# Altium PCB tc_tp5_ej1.PcbDoc
Units mm, origin at the board's own origin, x right, y up, seen from the top; angles counter-clockwise.
Board outline 100.08 x 100.04 mm, 2 copper layers (Top Layer, Bottom Layer); 46 components, 35 nets, 121 pads, 0 vias.
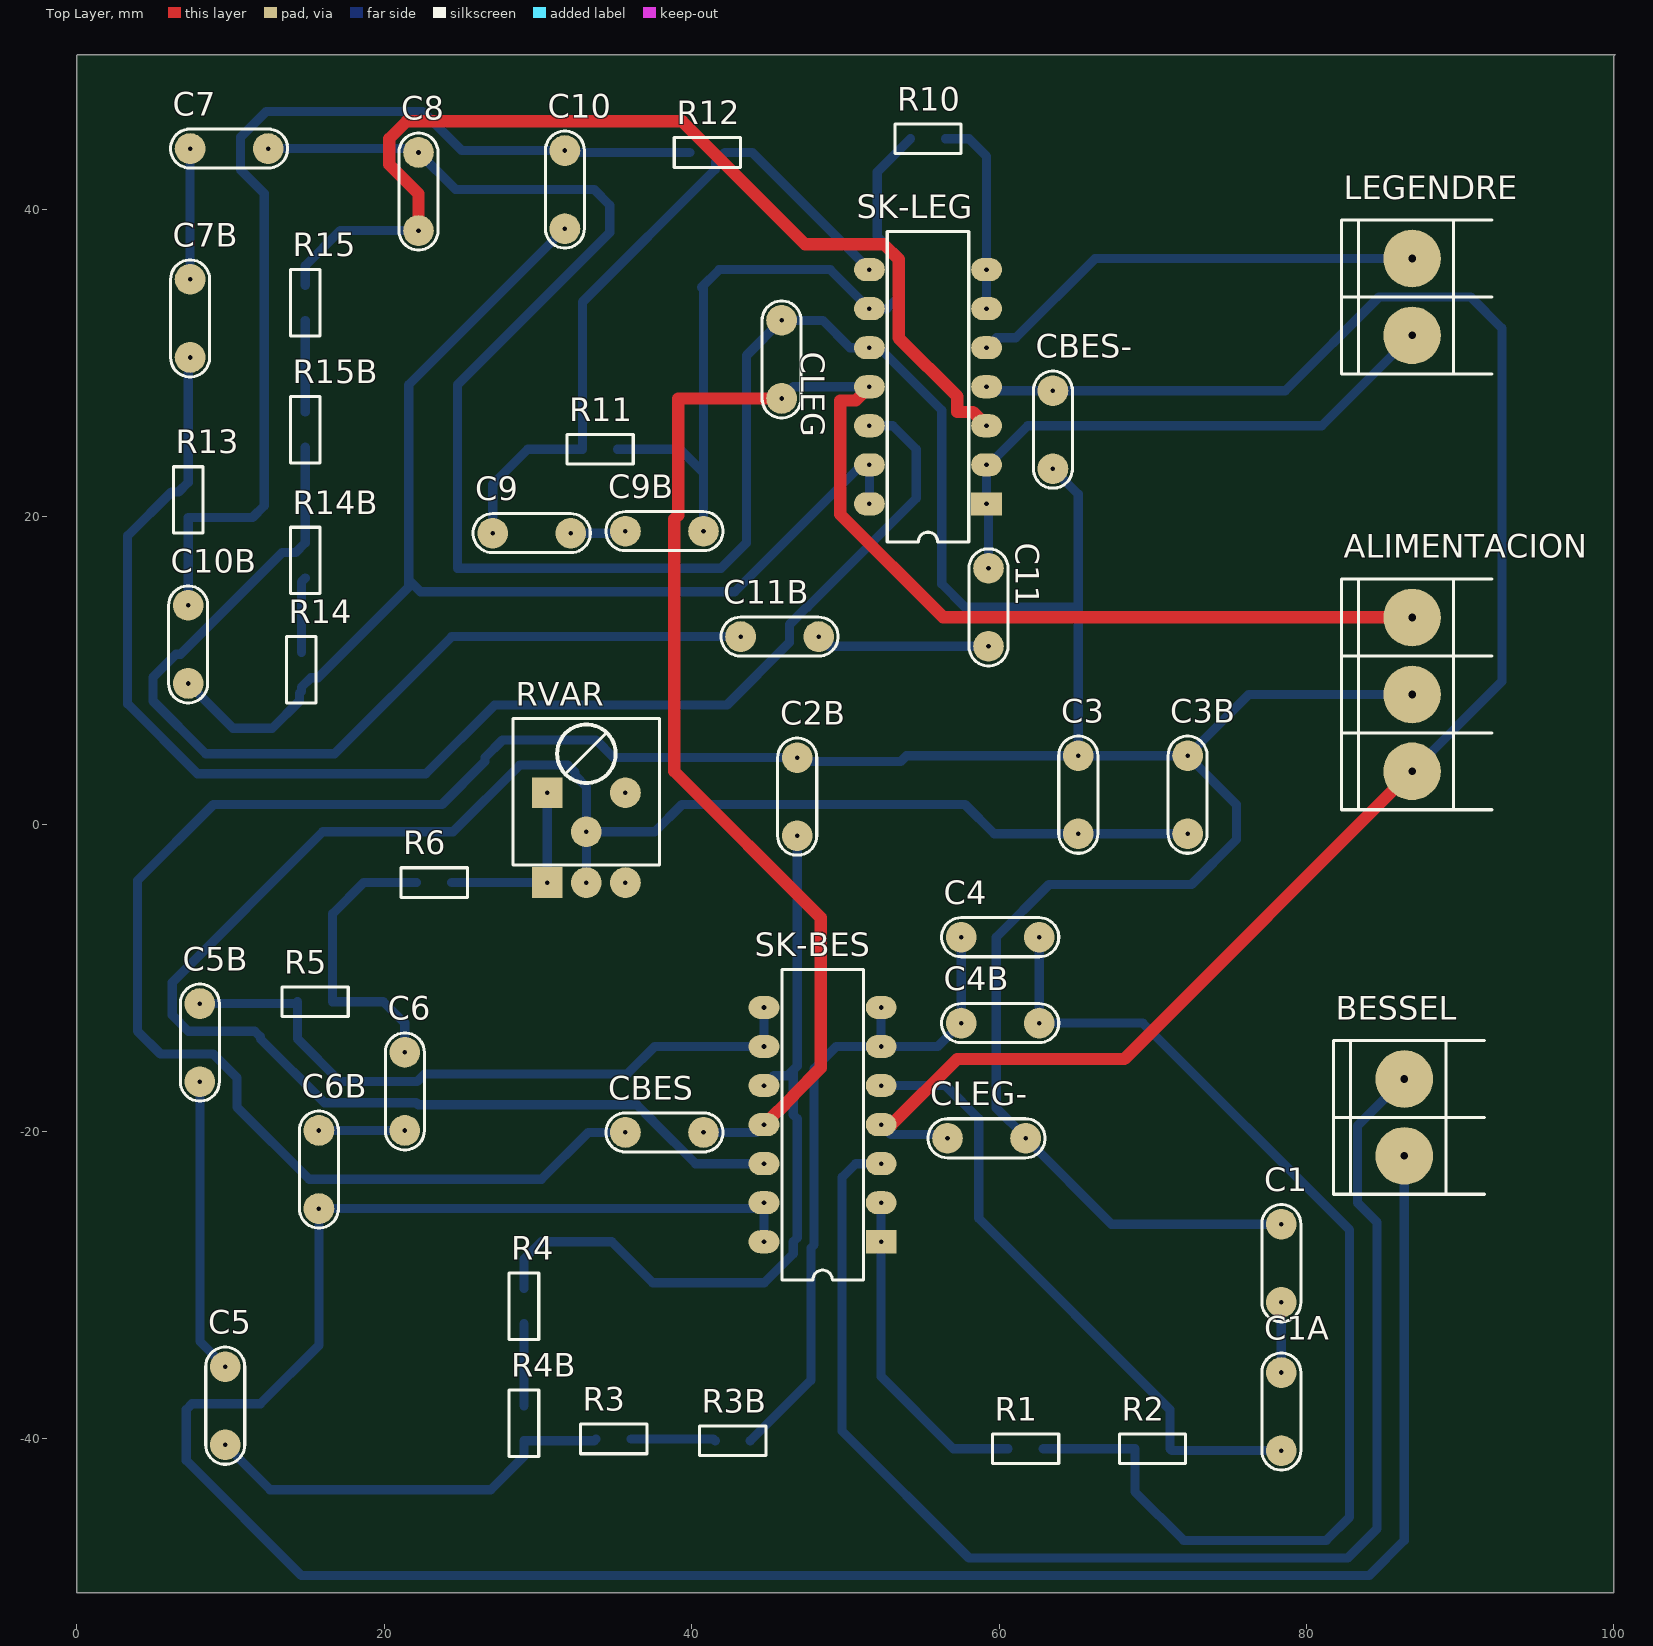
[diagram p0: Top Layer view]
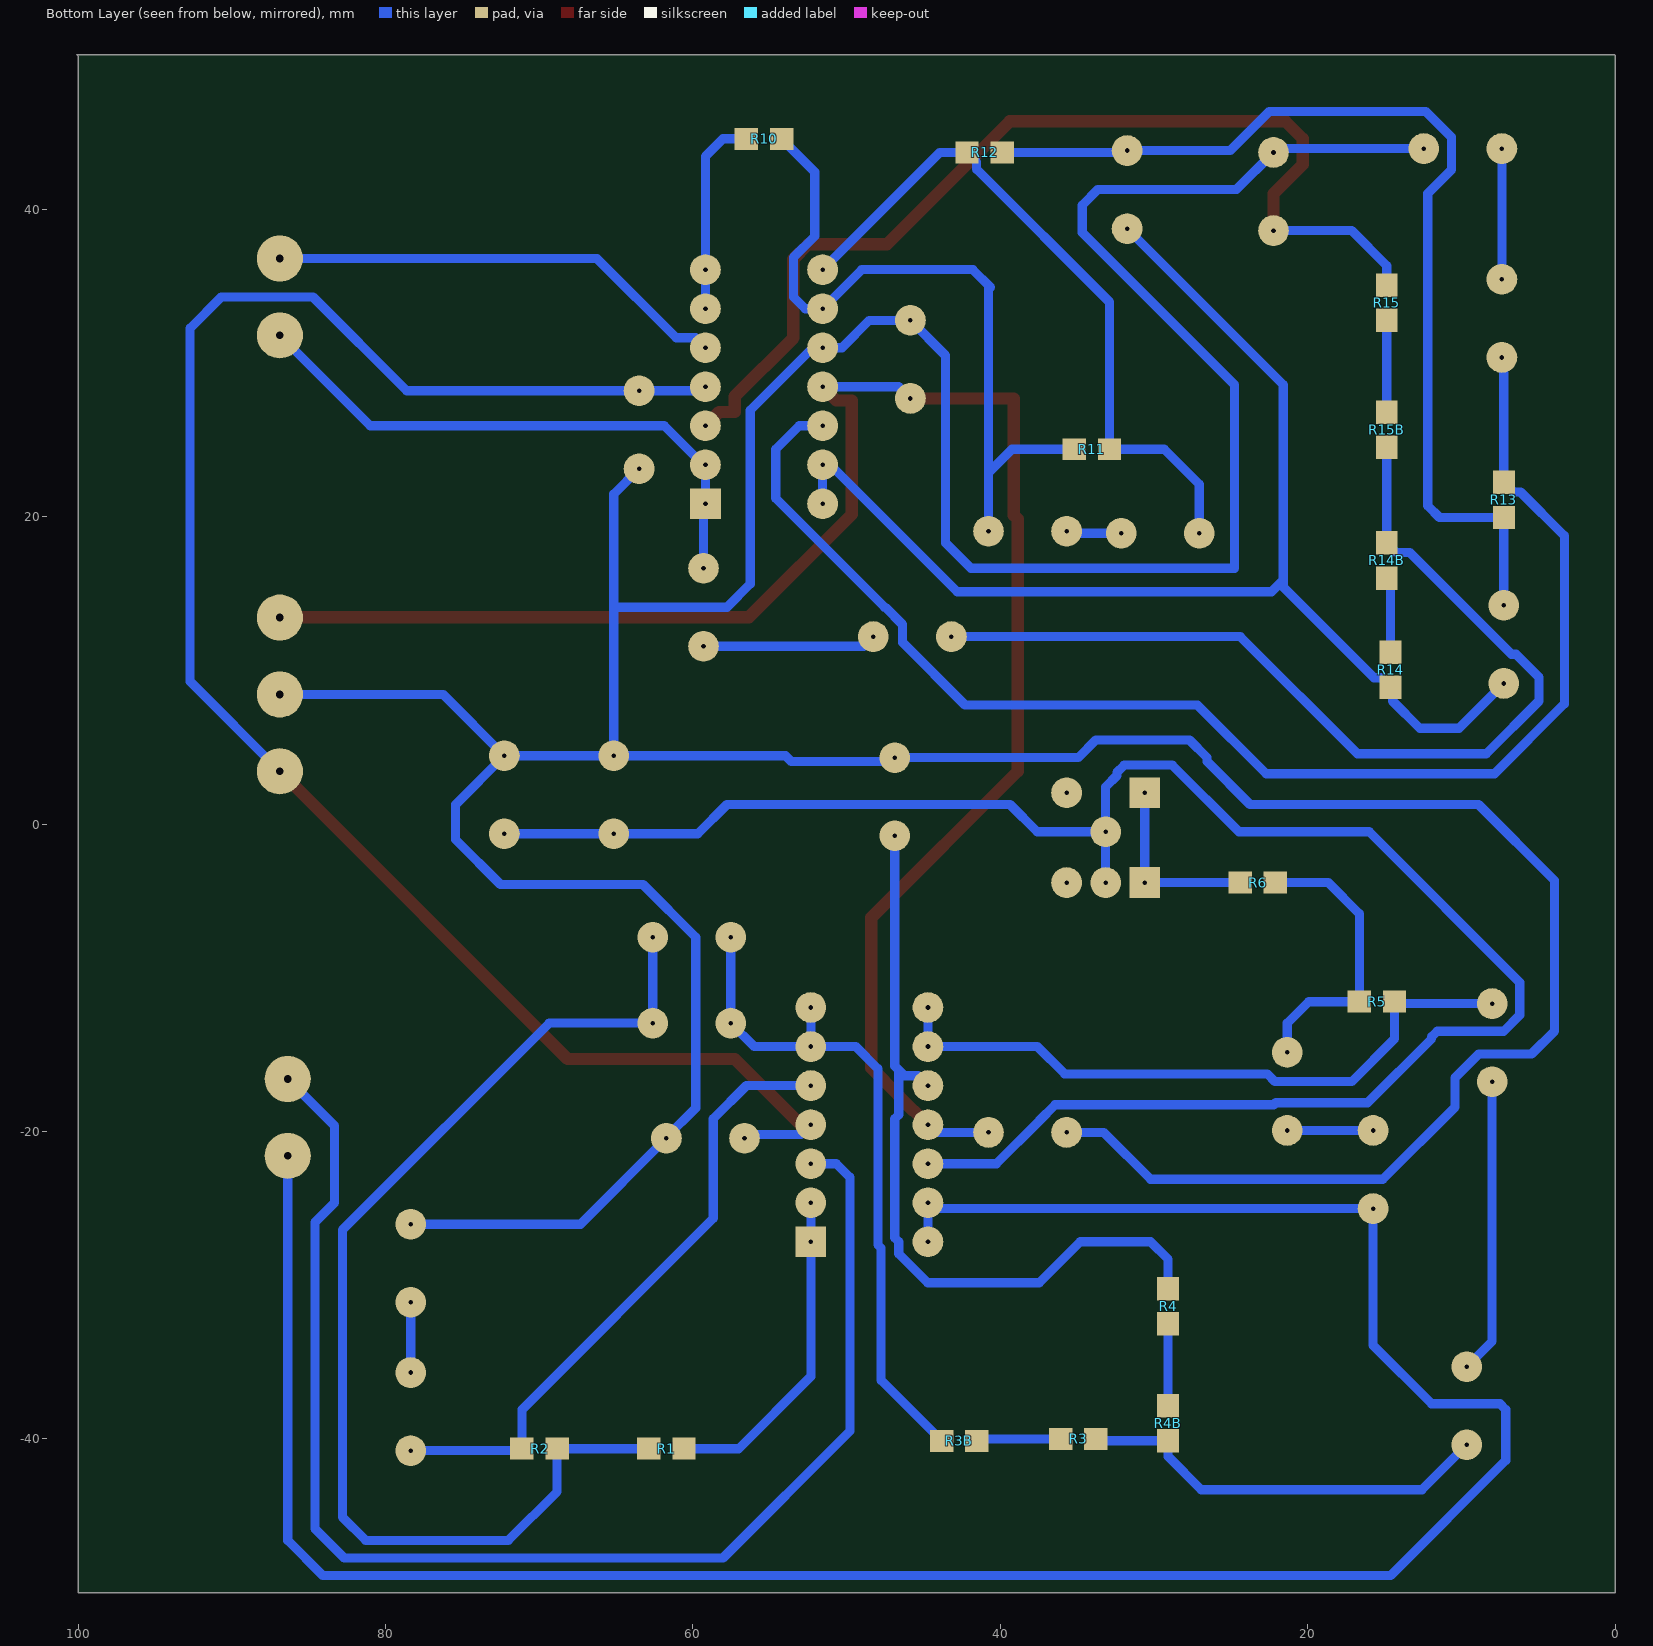
[diagram p1: Bottom Layer view, seen from below]
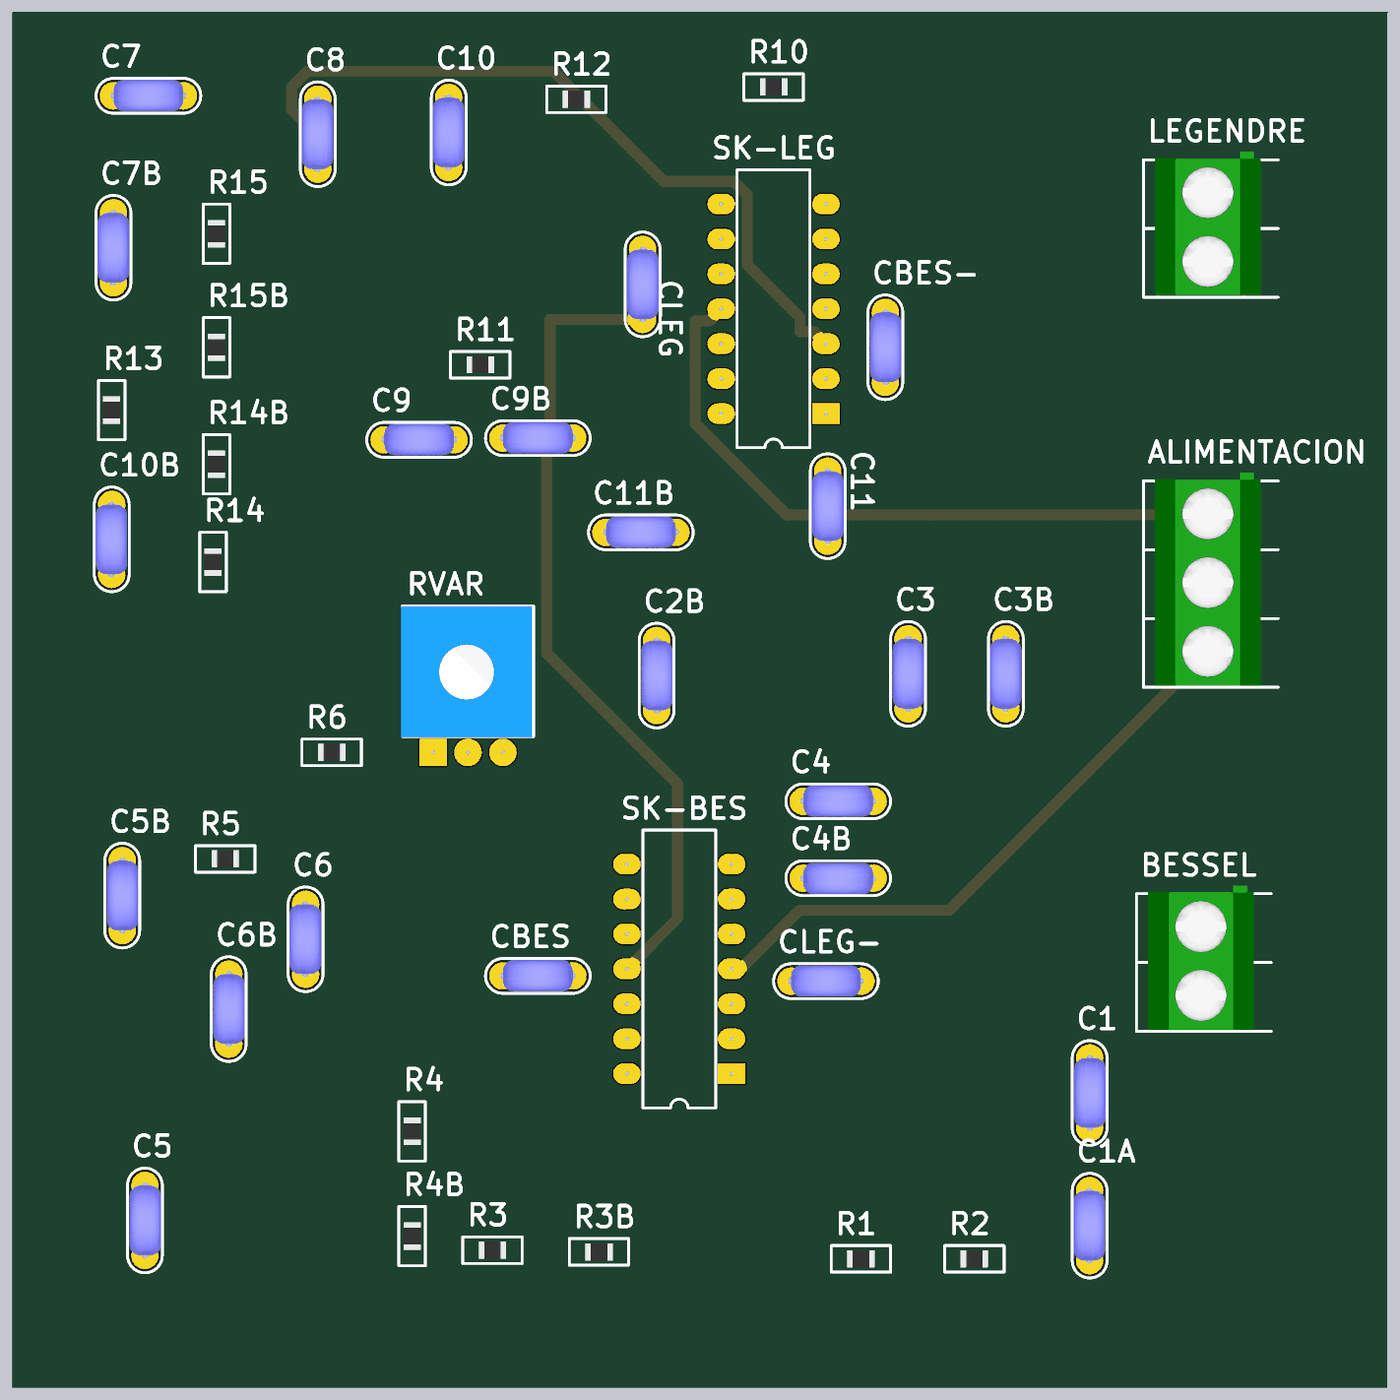
[diagram p2: 3D render of the assembled board from above, using the file's embedded part models]

## Layer stack, top to bottom
Top Solder: solder mask 0.0102, Solder Resist, Dk 3.5
Top Layer: signal copper 0.0356
Dielectric 1: dielectric 0.32, FR-4, Dk 4.8
Bottom Layer: signal copper 0.0356
Bottom Solder: solder mask 0.0102, Solder Resist, Dk 3.5

## Board outline
0,50 0.038,50.038 100.076,50.038 100,49.962 100,-50 0,-50

## Design rules (kind name [scope] priority, off if disabled: settings)
Clearance [All] p1: gap=0.5 ignorepadtopadclearanceinfootprint=FALSE
PolygonConnect [All] p1: connectstyle=Relief reliefconductorwidth=0.254 reliefentries=4 polygonreliefangle="90 Angle" airgapwidth=0.254
RoutingVias [All] p1: holewidth=0.5 width=2 viastyle="Through Hole" minholewidth=0.5 minwidth=2 maxholewidth=0.5 maxwidth=2
SolderMaskExpansion [All] p1: expansion=0.102
Width [All] p1: maxlimit=0.8 minlimit=0.6 preferedwidth=0.6
30 further rules are at their usual default settings.

## Classes and differential pairs
component class tc_tp5_ej1: ALIMENTACION BESSEL C1 C2B C3B C4 C4B C5 C5B C6 C6B C7 C7B C8 C9 C9B C10 C10B C11 C11B CBES CBES- CLEG CLEG- LEGENDRE R1 R2 R3 R3B R4 R4B R5 R6 R10 R12 R13 R14 R14B R15 R15B RVAR SK-LEG

## Components (designator, comment, footprint, x,y, rotation, side; value= is the part's Value field where it differs from the comment)
ALIMENTACION "BORNERA 3" BORNERA3 86.868,8.429 r0 top
BESSEL "BORNERA 2" BORNERA2 86.36,-19.09 r0 top
C1 "CAP" CAP200 78.359,-28.575 r90 top
C1A "CAP" CAP200 78.359,-38.227 r270 top
C2B "CAP" CAP200 46.863,1.778 r90 top
C3 "CAP" CAP200 65.151,1.905 r90 top
C3B "CAP" CAP200 72.263,1.905 r270 top
C4 "CAP" CAP200 60.071,-7.366 r180 top
C4B "CAP" CAP200 60.071,-12.954 r0 top
C5 "CAP" CAP200 9.652,-37.846 r90 top
C5B "CAP" CAP200 8.001,-14.224 r90 top
C6 "CAP" CAP200 21.336,-17.399 r270 top
C6B "CAP" CAP200 15.748,-22.479 r90 top
C7 "CAP" CAP200 9.906,43.942 r180 top
C7B "CAP" CAP200 7.366,32.893 r270 top
C8 "CAP" CAP200 22.225,41.148 r270 top
C9 "CAP" CAP200 29.591,18.923 r180 top
C9B "CAP" CAP200 38.227,19.05 r180 top
C10 "CAP" CAP200 31.75,41.275 r270 top
C10B "CAP" CAP200 7.239,11.684 r270 top
C11 "CAP" CAP200 59.309,14.097 r90 top
C11B "CAP" CAP200 45.72,12.192 r180 top
CBES "CAP" CAP200 38.227,-20.066 r180 top
CBES- "CAP" CAP200 63.5,25.654 r90 top
CLEG "CAP" CAP200 45.847,30.226 r90 top
CLEG- "CAP" CAP200 59.182,-20.447 r180 top
LEGENDRE "BORNERA 2" BORNERA2 86.868,34.29 r0 top
R1 "RES" 0805 61.722,-40.64 r0 top
R2 "RES" 0805 69.977,-40.64 r0 top
R3 "RES" 0805 34.925,-40.005 r180 top
R3B "RES" 0805 42.672,-40.132 r180 top
R4 "RES" 0805 29.083,-31.369 r90 top
R4B "RES" 0805 29.083,-38.989 r90 top
R5 "RES" 0805 15.494,-11.557 r0 top
R6 "RES" 0805 23.241,-3.81 r0 top
R10 "RES" 0805 55.372,44.577 r180 top
R11 "RES" 0805 34.036,24.384 r180 top
R12 "RES" 0805 41.021,43.688 r180 top
R13 "RES" 0805 7.239,21.082 r90 top
R14 "RES" 0805 14.605,10.033 r270 top
R14B "RES" 0805 14.859,17.145 r270 top
R15 "RES" 0805 14.859,33.909 r90 top
R15B "RES" 0805 14.859,25.654 r90 top
RVAR "PRESET" "PRESET H" 33.107,2.032 r0 top
SK-BES "TL074ACN" DIP14 48.514,-19.558 r90 top
SK-LEG "TL074ACN" DIP14 55.372,28.448 r90 top

## Footprints (in the part's own frame and the unit in brackets; to place one, negate y for a bottom-side part, rotate by r counter-clockwise, add the part's x,y. Pads: shape width x height; smd on the part's side, far side on the other; paste and mask are expansions set on the pad)
0805 [mil] "Pasivo 0805"
  rect 60x56 smd far side: 1(-45,0) 2(45,0)
  silkscreen extent -85,-38 85,38, body extent -40,-24 39,25, height 15
BORNERA2 [mm] "Bornera con Tornillos 5mm separación"
  round 3.75 / inner round 3.75 / far side round 3 hole 0.5: 1(0,2.5) 2(0,-2.5)
  silkscreen extent -4.6,-5 5.2,5, body extent -3.76,-4.89 3.94,5.61, height 10
BORNERA3 [mm] "Bornera con Tornillos 5mm separación"
  round 3.75 / inner round 3.75 / far side round 3 hole 0.5: 1(0,5) 2(0,0) 3(0,-5)
  silkscreen extent -4.6,-7.5 5.2,7.5, body extent -3.76,-7.39 3.94,8.11, height 10.05
CAP200 [mm]
  round 2 hole 0.3: 1(-2.54,0) 2(2.54,0)
  silkscreen extent -3.81,-1.27 3.81,1.27, body extent -2.79,-1.17 2.79,1.12, height 6.24
DIP14 [mm] "DIP; 14 Leads; Row Spacing 7.62 mm; Pitch 2.54 mm"
  rect 1.5x2 / inner rect 1.5x2 / far side rect 2x2 hole 0.3: 1(-7.62,-3.81)
  oval 1.5x2 / inner oval 1.5x2 / far side round 2 hole 0.3: 2(-5.08,-3.81) 3(-2.54,-3.81) 4(0,-3.81) 5(2.54,-3.81) 6(5.08,-3.81) 7(7.62,-3.81) 8(7.62,3.81) 9(5.08,3.81) 10(2.54,3.81) 11(0,3.81) 12(-2.54,3.81) 13(-5.08,3.81) 14(-7.62,3.81)
  silkscreen extent -10.1,-2.65 10.1,2.65
"PRESET H" [mm]
  rect 2x2 hole 0.3: 1(-2.5,-5.842) 1(-2.5,0)
  round 2 hole 0.3: 2(0.04,-5.842) 2(0.04,-2.54) 3(2.58,-5.842) 3(2.58,0)
  silkscreen extent -4.72,-4.7 4.8,4.83, body extent -4.83,-4.76 4.7,4.77, height 5

## Part data
SK-BES SK-LEG: "Low-Noise J-FET Quad Operational Amplifier", ComponentLink1Description="Manufacturer Link", ComponentLink1URL=http://www.st.com/, ComponentLink2Description=Datasheet, ComponentLink2URL=http://www.st.com/stonline/products/literature/ds/2297/tl074.pdf, DatasheetVersion=Dec-1998, LatestRevisionDate=06-Jun-2005, LatestRevisionNote="Stylized 3D Model Added.", PackageDescription="DIP; 14 Leads; Row Spacing 7.62 mm; Pitch 2.54 mm", PackageReference=DIP14, PackageVersion=Jan-1997, Published=24-Aug-2001, Publisher="Altium Limited"

## Nets (pads, with @x,y where several pads share a name; then routed paths per layer and width w, separated by ;. In a path a pad name is that pad's centre, name@x,y a point inside that pad or via, vN(x,y) a via of type N, cw(c..) or ccw(c..) an arc to the next point about the centre after c; other vN are vias at no path point)
BES_IN: BESSEL.1 SK-BES.3 | length 89.5
  Bottom Layer w0.6: SK-BES.3 50.673,-22.098 49.784,-22.987 49.784,-39.497 58.039,-47.752 82.677,-47.752 84.582,-45.847 84.582,-25.908 83.312,-24.638 83.312,-19.638 BESSEL.1
BES_OUT: BESSEL.2 C6B.1 SK-BES.13 SK-BES.14 | length 162.5
  Bottom Layer w0.6: SK-BES.14 SK-BES.13 44.323,-25.019 C6B.1 15.748,-33.909 11.938,-37.719 7.493,-37.719 7.112,-38.1 7.112,-41.402 14.605,-48.895 84.074,-48.895 86.36,-46.609 BESSEL.2
GND: ALIMENTACION.2 C1.2 C2B.2 C3.2 C3B.1 C7.1 C8.1 CBES-.1 CBES.2 CLEG-.1 CLEG.2 SK-LEG.10 | length 334.4
  Bottom Layer w0.6: C7.1 21.971,43.942 C8.1 24.638,41.275 33.655,41.275 34.671,40.259 34.671,38.481 24.765,28.575 24.765,16.637 41.91,16.637 43.561,18.288 43.561,30.48 CLEG.2 48.524,32.766 50.302,30.988 SK-LEG.10 52.197,30.988 56.261,26.924 56.261,15.621 57.785,14.097 65.151,14.097 ; CBES.2 33.274,-20.066 30.221,-23.119 15.113,-23.119 10.414,-18.42 10.414,-16.51 8.868,-14.964 5.439,-14.964 3.937,-13.462 3.937,-3.683 8.89,1.27 23.749,1.27 26.543,4.064 26.543,4.318 27.686,5.461 33.782,5.461 34.925,4.318 C2B.2 47.117,4.064 53.594,4.064 53.975,4.445 C3.2 ; CBES-.1 65.151,21.463 65.151,14.097 ; C1.2 67.31,-26.035 CLEG-.1 61.722,-20.387 59.817,-18.482 59.817,-7.366 63.246,-3.937 72.517,-3.937 75.438,-1.016 75.438,1.27 C3B.1 ; ALIMENTACION.2 76.247,8.429 C3B.1 ; C3.2 65.151,14.097 ; C3.2 C3B.1
LEG_IN: LEGENDRE.1 SK-LEG.5 | length 30.1
  Bottom Layer w0.6: SK-LEG.5 59.822,31.628 61.082,31.628 66.244,36.79 LEGENDRE.1
LEG_OUT: C11.2 LEGENDRE.2 SK-LEG.1 SK-LEG.2 | length 38
  Bottom Layer w0.6: C11.2 59.309,20.701 SK-LEG.1 SK-LEG.2 59.329,23.368 61.869,25.908 80.986,25.908 LEGENDRE.2
NetC1_1: C1.1 C1A.1 | length 4.6
  Bottom Layer w0.6: C1A.1 C1.1
NetC1A_2: C1A.2 R2.2 SK-BES.5 | length 41.2
  Bottom Layer w0.6: SK-BES.5 56.515,-17.018 58.674,-19.177 58.674,-25.654 71.12,-38.1 R2.2 71.247,-40.767 C1A.2
NetC2_1: C2B.1 R4.2 SK-BES.10 | length 52
  Bottom Layer w0.6: R4.2 29.083,-28.321 30.226,-27.178 34.798,-27.178 37.465,-29.845 44.724,-29.845 46.604,-27.965 46.604,-27.183 46.863,-26.924 46.863,-19.177 46.604,-18.918 46.604,-16.007 ; SK-BES.10 45.344,-16.378 46.233,-16.378 46.604,-16.007 ; C2B.1@47.117,-1.016 C2B.1 46.863,-15.748 46.604,-16.007
NetC3_1: C3.1 C3B.2 RVAR.2 SK-BES.12 | length 125.2
  Top Layer w0.8: RVAR.2@33.147,-3.957 RVAR.2@33.147,-3.81
  Bottom Layer w0.6: RVAR.2@33.147,-3.81 RVAR.2@33.147,-0.508 ; SK-BES.12 40.253,-22.098 37.487,-19.332 37.487,-19.32 36.433,-18.266 22.209,-18.266 22.082,-18.139 16.107,-18.139 11.938,-13.97 11.938,-13.843 11.579,-13.484 7.255,-13.484 6.201,-12.43 6.201,-10.309 16.002,-0.508 24.467,-0.508 28.807,3.832 31.938,3.832 32.407,3.363 32.407,3.153 33.147,2.413 RVAR.2@33.147,-0.508 ; C3B.2 C3.1 59.69,-0.635 57.785,1.27 39.37,1.27 37.592,-0.508 RVAR.2@33.147,-0.508
NetC4_1: C4.1 C4B.2 R1.2 R2.1 | length 74.7
  Bottom Layer w0.6: C4.1 C4B.2 69.342,-12.954 82.804,-26.416 82.804,-45.085 81.28,-46.609 72.009,-46.609 68.834,-43.434 R2.1 R1.2
NetC4_2: C4.2 C4B.1 R3B.1 SK-BES.6 SK-BES.7 | length 44.9
  Bottom Layer w0.6: R3B.1 47.752,-36.195 47.752,-27.591 47.963,-27.38 47.963,-15.918 49.403,-14.478 SK-BES.6 ; SK-BES.7 SK-BES.6 ; C4.2 C4B.1 56.007,-14.478 SK-BES.6
NetC5_1: C5.1 R3.2 R4B.1 | length 27.3
  Bottom Layer w0.6: C5.1 12.573,-43.307 26.924,-43.307 29.083,-41.148 R4B.1 33.655,-40.132 R3.2
NetC5_2: C5.2 C5B.1 | length 19.2
  Bottom Layer w0.6: C5B.1 8.001,-33.655 C5.2
NetC5B_2: C5B.2 R5.1 SK-BES.8 SK-BES.9 | length 43.8
  Bottom Layer w0.6: C5B.2 14.224,-11.684 R5.1 14.351,-13.97 17.14,-16.759 22.123,-16.759 22.626,-16.256 35.814,-16.256 37.592,-14.478 SK-BES.9 SK-BES.8
NetC6_1: C6.1 R5.2 R6.1 | length 19.2
  Bottom Layer w0.6: C6.1 21.336,-12.954 19.939,-11.557 R5.2 16.637,-5.842 18.669,-3.81 R6.1
NetC6_2: C6.2 C6B.2 | length 5.6
  Bottom Layer w0.6: C6B.2 C6.2
NetC7_2: C7.2 C7B.1 | length 8.5
  Bottom Layer w0.6: C7B.1 C7.2
NetC7B_2: C7B.2 R13.2 SK-LEG.12 | length 91.6
  Bottom Layer w0.6: 7.239,29.337 R13.2 6.615,21.601 6.155,21.601 3.302,18.748 3.302,7.814 7.844,3.272 22.703,3.272 27.178,7.747 42.291,7.747 46.36,11.816 46.36,12.979 47.473,14.092 47.513,14.092 54.61,21.189 54.61,24.384 53.086,25.908 SK-LEG.12
NetC8_2: C8.2 R15.2 SK-LEG.3 | length 67.5
  Top Layer w0.8: C8.2 22.225,41.001 20.325,42.901 20.325,44.582 21.458,45.715 39.375,45.715 47.372,37.718 52.495,37.718 53.462,36.751 53.462,31.628 57.282,27.808 57.282,26.798 58.292,26.798 SK-LEG.3
  Bottom Layer w0.6: R15.2 14.859,36.322 17.145,38.608 C8.2
NetC9_1: C9.1 C9B.2 | length 3.6
  Bottom Layer w0.6: C9.1 35.56,18.923 C9B.2
NetC9_2: C9.2 R11.2 R12.1 SK-LEG.8 | length 45.7
  Bottom Layer w0.6: C9.2 27.051,22.098 29.337,24.384 R11.2 32.893,33.957 41.54,42.604 41.54,43.064 R12.1 43.942,43.688 SK-LEG.8
NetC9B_1: C9B.1 R10.2 R11.1 SK-LEG.9 | length 48.6
  Top Layer w0.8: SK-LEG.9@51.519,33.528 SK-LEG.9
  Bottom Layer w0.6: R11.1 39.243,24.384 40.767,22.86 ; C9B.1 40.767,22.86 ; R10.2 52.07,42.418 52.07,38.247 53.462,36.855 53.462,34.295 52.695,33.528 SK-LEG.9 51.556,33.528 49.016,36.068 41.783,36.068 40.64,34.925 40.767,34.798 40.767,22.86
NetC10_1: C10.1 C10B.1 R12.2 R13.1 | length 66.6
  Bottom Layer w0.6: C10B.1 R13.1 11.43,19.939 12.192,20.701 12.192,41.021 10.646,42.567 10.646,44.688 12.313,46.355 22.499,46.355 25.039,43.815 C10.1 31.877,43.688 R12.2
NetC10_2: C10.2 C10B.2 R14.2 SK-LEG.13 SK-LEG.14 | length 83.6
  Bottom Layer w0.6: C10B.2 10.16,6.223 12.7,6.223 14.478,8.001 14.478,8.509 14.605,8.636 R14.2 15.229,9.514 15.689,9.514 21.59,15.415 21.59,15.875 ; C10.2 21.59,28.575 21.59,15.875 ; SK-LEG.14 SK-LEG.13 51.054,23.368 42.799,15.113 22.352,15.113 21.59,15.875
NetC11_1: C11.1 C11B.1 | length 11.3
  Bottom Layer w0.6: C11B.1 48.895,11.557 C11.1
NetC11B_2: C11B.2 R14B.1 R15B.1 | length 64.1
  Bottom Layer w0.6: R15B.1 R14B.1 14.235,17.664 13.366,17.664 6.746,11.044 6.452,11.044 4.953,9.545 4.953,8.001 8.382,4.572 16.764,4.572 24.384,12.192 C11B.2
NetR1_1: R1.1 SK-BES.1 SK-BES.2 | length 21.5
  Bottom Layer w0.6: SK-BES.2 SK-BES.1 52.324,-35.941 57.023,-40.64 R1.1
NetR3_1: R3.1 R3B.2 | length 5.5
  Bottom Layer w0.6: R3.1 41.402,-40.005 R3B.2
NetR4_1: R4.1 R4B.2 | length 5.3
  Bottom Layer w0.6: R4B.2 R4.1
NetR6_2: R6.2 RVAR.1 | length 12.1
  Bottom Layer w0.6: R6.2 30.607,-3.81 RVAR.1@30.607,2.032
NetR10_1: R10.1 SK-LEG.6 SK-LEG.7 | length 13
  Bottom Layer w0.6: R10.1 58.039,44.577 59.182,43.434 SK-LEG.7 SK-LEG.6
NetR14_1: R14.1 R14B.2 | length 4.9
  Bottom Layer w0.6: R14.1 14.605,15.748 R14B.2
NetR15_1: R15.1 R15B.2 | length 6
  Bottom Layer w0.6: R15B.2 R15.1
VCC+: ALIMENTACION.1 CBES.1 CLEG.1 SK-BES.11 SK-LEG.11 | length 119.4
  Top Layer w0.8: SK-BES.11 45.594,-18.668 45.637,-18.668 46.604,-17.701 46.604,-17.658 48.387,-15.875 48.387,-6.086 38.867,3.434 38.867,19.837 39.121,20.091 39.121,27.686 CLEG.1 ; SK-LEG.11 50.672,27.558 49.662,27.558 49.662,20.145 56.35,13.457 86.868,13.457 ALIMENTACION.1
  Bottom Layer w0.6: CBES.1 44.196,-20.066 SK-BES.11 ; CLEG.1 46.609,28.448 SK-LEG.11
VCC-: ALIMENTACION.3 CBES-.2 CLEG-.2 SK-BES.4 SK-LEG.4 | length 117.1
  Top Layer w0.8: SK-BES.4 53.006,-19.558 57.274,-15.29 68.149,-15.29 ALIMENTACION.3
  Bottom Layer w0.6: SK-BES.4 52.964,-20.198 56.642,-20.198 CLEG-.2 ; SK-LEG.4 59.436,28.194 CBES-.2 78.613,28.194 84.709,34.29 90.678,34.29 92.71,32.258 92.71,9.271 ALIMENTACION.3
pads on no net: RVAR.3